# Altium PCB TramHanSTM8.PcbDoc
Units mm, origin at the board's own origin, x right, y up, seen from the top; angles counter-clockwise.
Board outline 64.47 x 27.51 mm, 2 copper layers (Top Layer, Bottom Layer); 38 components, 40 nets, 158 pads, 17 vias.
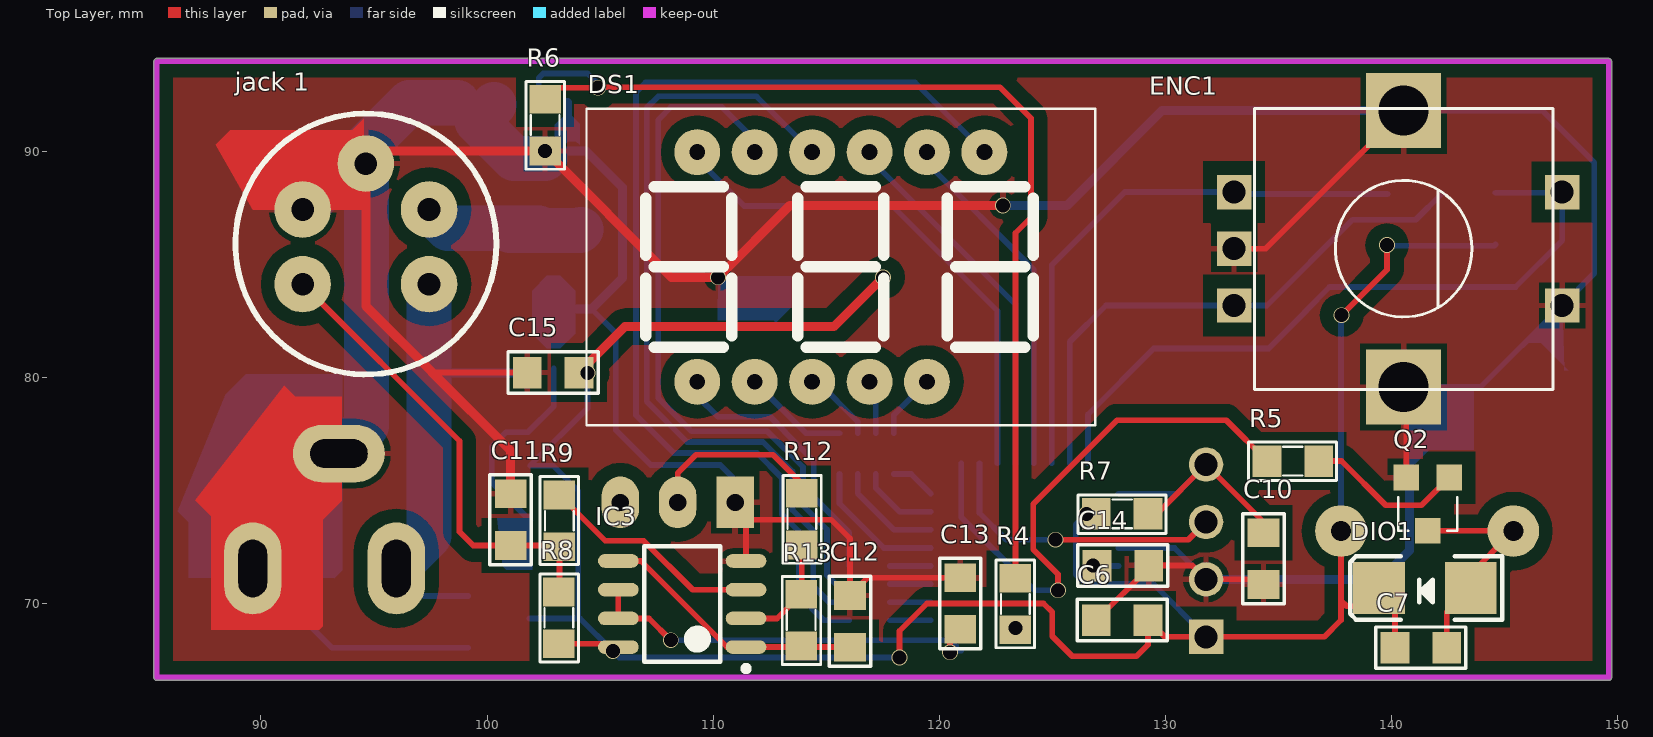
[diagram p0: Top Layer view]
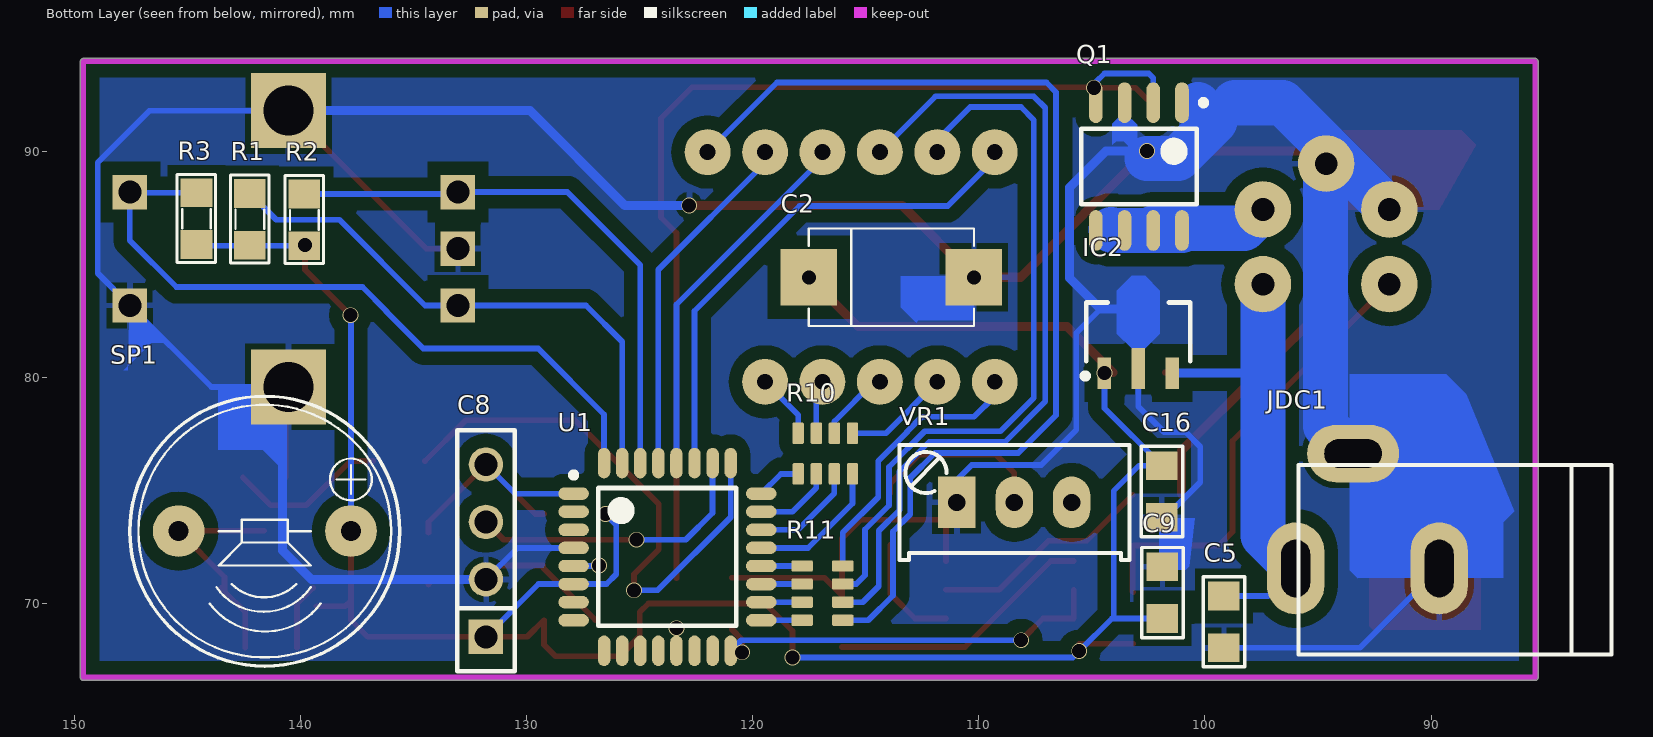
[diagram p1: Bottom Layer view, seen from below]
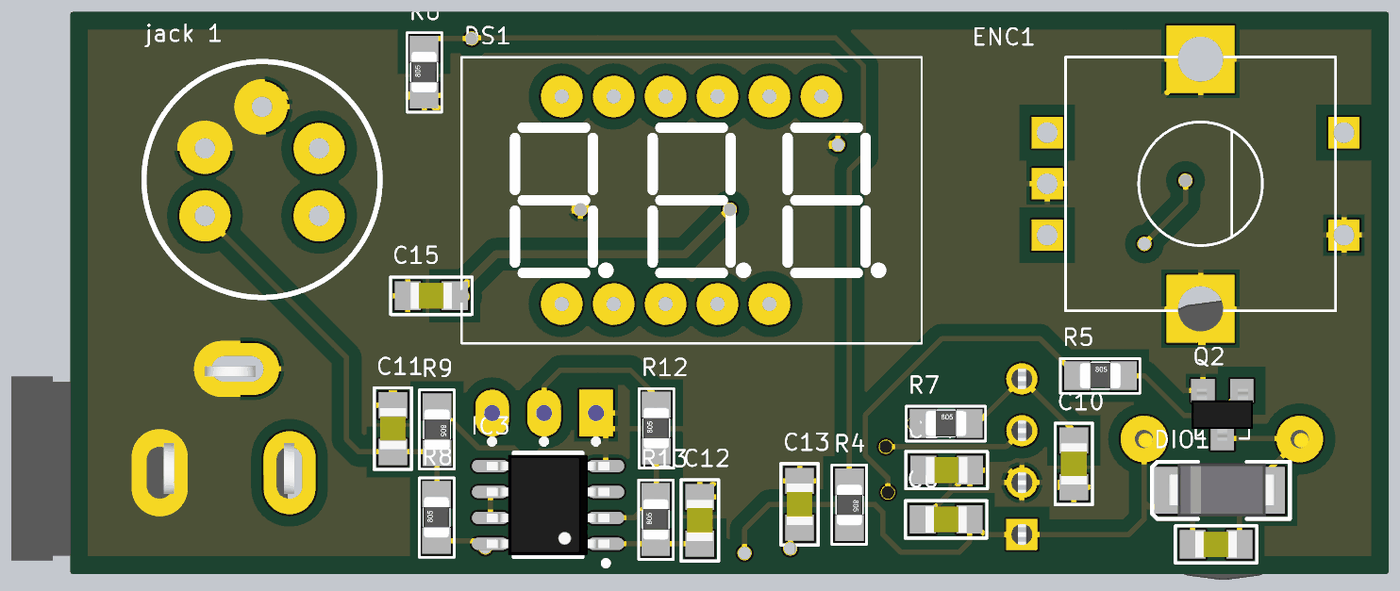
[diagram p2: 3D render of the assembled board from above, using the file's embedded part models]
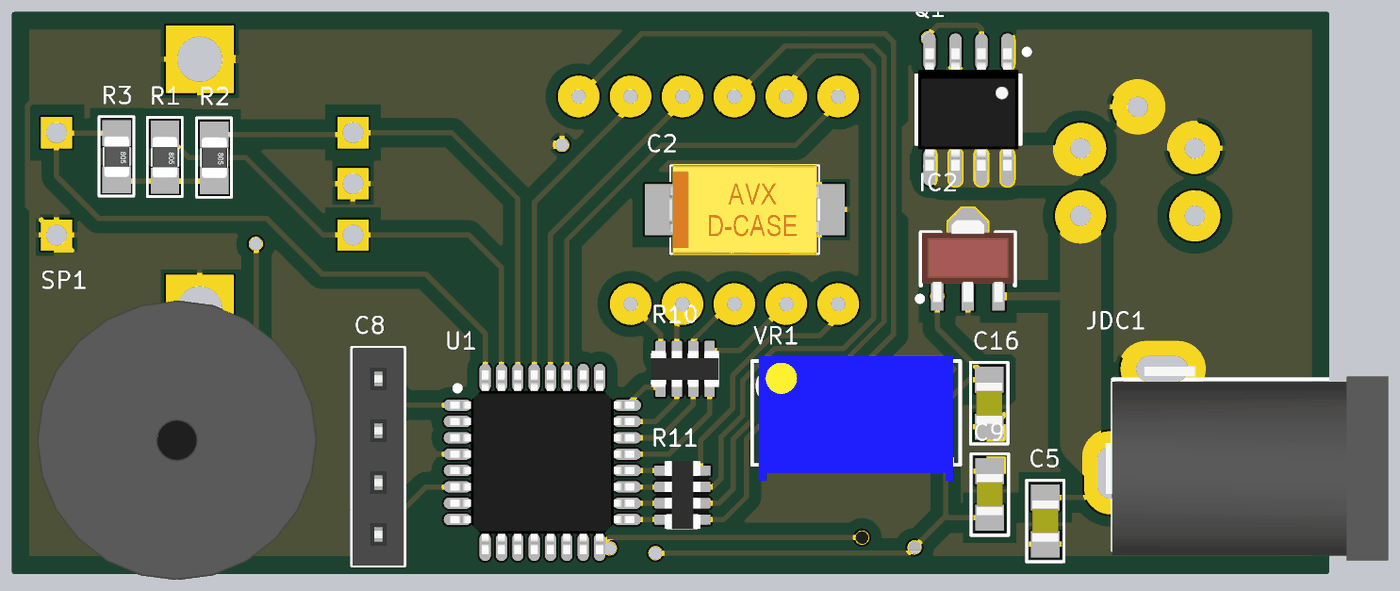
[diagram p3: 3D render of the assembled board from below, using the file's embedded part models]

## Layer stack, top to bottom
Top Solder: solder mask 0.0102, Solder Resist, Dk 3.5
Top Layer: signal copper 0.0356
Dielectric 1: dielectric 0.32, FR-4, Dk 4.8
Bottom Layer: signal copper 0.0356
Bottom Solder: solder mask 0.0102, Solder Resist, Dk 3.5

## Board outline
85.267,66.726 ccw(c85.395,66.726) 85.395,66.598 149.606,66.598 ccw(c149.606,66.726) 149.733,66.726 149.733,93.98 ccw(c149.606,93.98) 149.606,94.107 85.395,94.107 ccw(c85.395,93.98) 85.267,93.98

## Design rules (kind name [scope] priority, off if disabled: settings)
Clearance [All] p1: gap=0.22 ignorepadtopadclearanceinfootprint=FALSE
PolygonConnect [All] p1: connectstyle=Relief reliefconductorwidth=0.254 reliefentries=4 polygonreliefangle="90 Angle" airgapwidth=0.254
RoutingVias [All] p1: holewidth=0.62 width=0.7 viastyle="Through Hole" minholewidth=0.62 minwidth=0.7 maxholewidth=0.62 maxwidth=0.7
SolderMaskExpansion [All] p1: expansion=0.102
Width [All] p1: maxlimit=2 minlimit=0.254 preferedwidth=0.4
30 further rules are at their usual default settings.

## Components (designator, comment, footprint, x,y, rotation, side; value= is the part's Value field where it differs from the comment)
C2 "CAP" "C 2917" 113.868,84.43 r180 bottom value=*uF
C5 "103" SM-0805 99.162,69.19 r90 bottom
C6 "103" SM-0805 128.092,69.266 r0 top
C7 "103" SM-0805 141.3,68.047 r0 top
C8 "JP4" JP4-C1T 131.801,68.529 r90 bottom
C9 "103" SM-0805 101.879,70.485 r270 bottom
C10 "103" SM-0805 134.341,71.984 r90 top
C11 "103" SM-0805 101.041,73.711 r270 top
C12 "103" SM-0805 116.053,69.215 r90 top
C13 "103" SM-0805 120.929,70.002 r90 top
C14 "103" SM-0805 128.118,71.679 r0 top
C15 "103" SM-0805 102.921,80.213 r180 top
C16 "103" SM-0805 101.905,74.955 r270 bottom
DIO1 "Diode SMD" DIO-SMD-106 141.478,70.688 r0 top value=1N5007
DS1 "7SEG" "LED 7 SEG 3 DIGIT" 115.646,84.887 r0 top
ENC1 "enc" ENC 140.411,95.856 r270 top
IC2 "LM78xx" SOT89-321 102.946,81.991 r90 bottom
IC3 "LM358" SO8 108.63,69.977 r180 top
"jack 1" "907" "jack 907" 98.323,87.173 r180 top
JDC1 "Jac DC" DC0 92.812,74.092 r0 bottom
Q1 "IRF7303" SO8 102.921,89.326 r270 bottom
Q2 "C1815" "SOT 23" 141.605,74.397 r180 top
R1 "1k" SM-RES-0805 142.24,88.138 r270 bottom value="R1/4W - 1K"
R2 "1k" SM-RES-0805 139.827,88.113 r270 bottom value="R1/4W - 1K"
R3 "1k" SM-RES-0805 144.602,88.163 r270 bottom value="R1/4W - 1K"
R4 "1k" SM-RES-0805 123.368,71.12 r270 top value="R1/4W - 1K"
R5 "1k" SM-RES-0805 134.493,76.302 r0 top value="R1/4W - 1K"
R6 "10k" SM-RES-0805 102.565,90.018 r90 top value="R1/4W - 1K"
R7 "1k" SM-RES-0805 126.949,73.965 r0 top value="R1/4W - 1K"
R8 "1.5k" SM-RES-0805 103.175,68.224 r90 top value="R1/4W - 1K"
R9 "10k" SM-RES-0805 103.2,74.803 r270 top value="R1/4W - 1K"
R10 "RP330" RESCAXS50P160X320X70-8N 116.789,76.632 r90 bottom
R11 "RP330" RESCAXS50P160X320X70-8N 116.916,70.46 r180 bottom
R12 "1k" SM-RES-0805 113.919,72.593 r90 top value="R1/4W - 1K"
R13 "10k" SM-RES-0805 113.894,68.123 r90 top value="R1/4W - 1K"
SP1 "Speaker" SPEAKER 141.58,73.203 r0 bottom value="Speaker Chip"
U1 "STM8S003K3" TQFP32 123.774,72.06 r180 bottom
VR1 "10K" VR1 110.973,74.473 r180 bottom value="VR 10K"

## Footprints (in the part's own frame and the unit in brackets; to place one, negate y for a bottom-side part, rotate by r counter-clockwise, add the part's x,y. Pads: shape width x height; smd on the part's side, far side on the other; paste and mask are expansions set on the pad)
"C 2917" [mm] "Tantalium 100u/16V"
  rect 2.5x2.5 smd: 1(-3.65,0) 2(3.65,0)
  silkscreen extent -3.65,-2.16 3.65,2.16, body extent -3.7,-2.22 3.7,2.23, height 3.01
DC0 [mil] "Jac DC input"
  oval 100x160 hole 50 slot 100 at 90 deg: 1(125,100) 2(-125,100)
  oval 160x100 hole 50 slot 100 at 0 deg: 3(25,-100)
  silkscreen extent -425,-80 120,250, body extent -410,-105 134,269, height 434
DIO-SMD-106 [mil]
  rect 90x90.55 smd: 1(80,0) 2(-80,0)
  silkscreen extent -130,-55 135,55, body extent -99,-50 106,52, height 95
ENC [mil] "encoder"
  rect 60x60 hole 40: A(301.57,-290.28) B(499,-290.28) C(400,-290.28) D(301.57,281) E(499,281)
  rect 130.51x130.5 hole 87: GND1(159.84,5)
  rect 130.5x130.5 hole 87: GND2(641,5)
  silkscreen extent 156,-255 645,265
"jack 907" [mm]
  round 2.5 hole 1: 1(0.889,3.048) 2(0.889,-0.254) 3(6.477,-0.254) 4(6.477,3.048) 5(3.683,-2.286)
  silkscreen extent -2.09,-4.5 9.45,7.04
JP4-C1T [mm] "4 row, straight, gold plating"
  rect 1.52x1.52 hole 1.02: 1(0,0)
  round 1.52 hole 1.02: 2(2.54,0) 3(5.08,0) 4(7.62,0)
  silkscreen extent -1.52,-1.27 9.14,1.27, body extent -1.52,-1.25 9.14,1.25, height 8.51
"LED 7 SEG 3 DIGIT" [mil] "LD-3361BS"
  round 80 hole 27.56: 1(-250,-200) 2(-150,-200) 3(-50,-200) 4(50,-200) 5(150,-200) 6(250,200) 7(150,200) 8(50,200) 9(-50,200) 10(-150,200) 11(-250,200)
  round 30 on Top Overlay: 12(-165,-135) 12(100,-135) 12(360,-135)
  silkscreen extent -443,-276 443,276
RESCAXS50P160X320X70-8N [mm]
  round 0.254 on Mech15: 0(0,0)
  rrect25% 0.95x0.5 smd: 1(-0.9,1.2) 2(-0.9,0.4) 3(-0.9,-0.4) 4(-0.9,-1.2) 5(0.9,-1.2) 6(0.9,-0.4) 7(0.9,0.4) 8(0.9,1.2)
  Top Layer pour cut-out: -0.4,1.7 0.4,1.7 0.4,-1.7 -0.4,-1.7
  body extent -0.87,-1.68 0.88,1.67, height 0.7
SM-0805 [mil] "Compoment SMD 80x50mil"
  rect 50x55 smd: 1(-45,0) 2(45,0)
  silkscreen extent -78,-36 78,36, body extent -40,-25 40,25, height 24
SM-RES-0805 [mil]
  rect 50x55 smd: 1(0,0) 2(90,0)
  silkscreen extent -32,-34 121,33, body extent 6,-25 84,25, height 31
SO8 [mm] "SOIC, 8-Leads, Body 4.9x3.9mm, Pitch 1.27mm, IPC High Density"
  oval 1.8x0.6 smd: 1(-2.825,1.905) 2(-2.825,0.635) 3(-2.825,-0.635) 4(-2.825,-1.905) 5(2.825,-1.905) 6(2.825,-0.635) 7(2.825,0.635) 8(2.825,1.905)
  silkscreen extent -2.95,-2.55 1.68,2.98, body extent -2.99,-2.45 3,2.45, height 1.6
SOT89-321 [mm] "SOT89, 3-Leads, Body 4.55x2.55mm, Pitch 1.50mm, Lead Span 4.1mm, IPC Medium Density"
  rect 1.4x0.6 smd: 1(-1.8,-1.5) 3(-1.8,1.5)
  rect 1.8x0.6 smd: 2(-1.6,0)
  Top Layer region: -0.7,0.3 -0.05,0.95 1.85,0.95 2.5,0.3 2.5,-0.3 1.85,-0.95 -0.05,-0.95 -0.7,-0.3
  silkscreen extent -2.05,-2.3 1.32,2.48, body extent -2.08,-2.25 1.92,2.25, height 1.5
"SOT 23" [mil]
  rect 45x45 smd: 1(-37.4,-46.26) 2(37.4,-46.26) 3(0,46.26)
  silkscreen extent -51,-12 51,46, body extent -59,-50 59,50, height 43
SPEAKER [mil]
  round 90 hole 35: 1(-150,0) 2(150,0)
  silkscreen extent -235,-235 235,235, body extent -266,-267 272,272, height 299
TQFP32 [mm] "Thin QFP, 32-Leads, Body 9x9mm, Pitch 0.8mm, IPC Low Density"
  oval 1.35x0.55 smd: 1(-4.15,2.8) 2(-4.15,2) 3(-4.15,1.2) 4(-4.15,0.4) 5(-4.15,-0.4) 6(-4.15,-1.2) 7(-4.15,-2) 8(-4.15,-2.8) 17(4.15,-2.8) 18(4.15,-2) 19(4.15,-1.2) 20(4.15,-0.4) 21(4.15,0.4) 22(4.15,1.2) 23(4.15,2) 24(4.15,2.8)
  oval 0.55x1.35 smd: 9(-2.8,-4.15) 10(-2,-4.15) 11(-1.2,-4.15) 12(-0.4,-4.15) 13(0.4,-4.15) 14(1.2,-4.15) 15(2,-4.15) 16(2.8,-4.15) 25(2.8,4.15) 26(2,4.15) 27(1.2,4.15) 28(0.4,4.15) 29(-0.4,4.15) 30(-1.2,4.15) 31(-2,4.15) 32(-2.8,4.15)
  silkscreen extent -4.28,-3.05 3.05,3.75, body extent -4.5,-4.5 4.5,4.5, height 1.4
VR1 [mil] "Variable Resistor"
  rect 65x90 hole 30: 1(0,0)
  oval 65x90 hole 30: 2(100,0) 3(200,0)
  silkscreen extent -100,-100 301,100, body extent -87,-130 288,110, height 455

## Part data
C5 C6 C7 C9 C10 C11 C12 C13 C14 C15 C16: library part CM, "Cap SMD"
C8: "WR-PHD 2.54 mm Angled Socket Header", Manufacturer="Würth Elektronik eiSos GmbH", partNo=613004143121, ComponentLink1 Description=Manufacturer, ComponentLink1URL=http://www.we-online.com, ComponentLink2 Description=Datasheet, ComponentLink2URL=http://katalog.we-online.de/em/datasheet/6130xx143121.pdf, Created by="Karrer Zheng", Created Date="29 March 2013", NoPins=04
DIO1: "Default Diode", Code - JEDEC=DO-214-AB, Published=8-Jun-2000, Publisher="Altium Limited", Revision="July-2002: Re-released for DXP Platform."
DS1: library part "LED 7 SEG 3 DIGIT"
ENC1: library part ENC
IC2: "Positive Voltage Regulator", ComponentLink1Description="Manufacturer Link", ComponentLink1URL=http://www.st.com/, ComponentLink2Description=Datasheet, ComponentLink2URL=http://www.st.com/stonline/products/literature/ds/2146/l78m05c.pdf, DatasheetVersion=Apr-1994, LatestRevisionDate=17-Jul-2002, LatestRevisionNote="Re-released for DXP Platform.", Note="Tab is connected to pin 3 (GND).", PackageDescription="TO, Thru-Hole, Vertical, Heatsink Mounted; 3 In-Line Leads; Pitch 2.54 mm; Pin sequence 1, 3, 2", PackageReference=ISOWATT220AB, PackageVersion=Jul-1998, Published=24-Aug-2001, Publisher="Altium Limited"
IC3: "Low-Power Dual Operational Amplifier"
"jack 1": library part "jack 907"
JDC1: library part DCIN, "Jac DC input"
Q1: "HEXFET Power MOSFET", Code_IPC=SOIC127P600-8, Code_JEDEC=MS-012-AA, ComponentLink1Description="Manufacturer Link", ComponentLink1URL=http://www.irf.com/, ComponentLink2Description=Datasheet, ComponentLink2URL=http://www.irf.com/product-info/datasheets/data/irf7303.pdf, DatasheetVersion=Aug-1997, LatestRevisionDate=13-Apr-2006, LatestRevisionNote="IPC-7351 Footprint Added.", PackageDescription="8-Pin Plastic Small Outline Integrated Circuit 1.27 mm Pitch", PackageReference=SO-8, PackageVersion=Feb-2001, Published=8-Jun-2000, Publisher="Altium Limited"
Q2: library part C1815_SMD
R1 R2 R3 R4 R5 R6 R7 R8 R9 R12 R13: library part R1/4W, "Resistor 1/4W"
R10 R11: library part ResPack
SP1: library part SPK, "Speaker Chip"
U1: "MCU 8BIT  8KB FLASH LQFP-32"
VR1: library part VR1, "Var Resistor"

## Via types
v1: diameter 0.7, hole 0.62, Top Layer to Bottom Layer, 17 vias

## Nets (pads, with @x,y where several pads share a name; then routed paths per layer and width w, separated by ;. In a path a pad name is that pad's centre, name@x,y a point inside that pad or via, vN(x,y) a via of type N, cw(c..) or ccw(c..) an arc to the next point about the centre after c; other vN are vias at no path point)
24V: "jack 1.1" C5.2 IC2.1 JDC1.1 | length 21.1
  Bottom Layer w0.254: JDC1.1 97.206,70.333 C5.2
  Bottom Layer w0.4: 97.434,79.654 97.971,80.191 IC2.1
  Bottom Layer w2: JDC1.1 97.434,73 97.434,79.654 97.434,84.125
"907 sensor": "jack 1.4" C11.2 R8.2 R9.2 | length 20.5
  Top Layer w0.254: 91.846,84.125 98.781,77.191 98.781,73.177 99.39,72.568 C11.2 103.149,72.568 R9.2 103.2,70.536 R8.2
GND: "jack 1.3" "jack 1.5" C2.2 C5.1 C6.1 C8.2 C9.1 C10.1 C11.1 C12.2 C13.2 C14.2 C15.2 C16.2 ENC1.C ENC1.E ENC1.GND1 ENC1.GND2 IC2.2 IC3.4 JDC1.2 JDC1.3 Q1.1 Q1.3 Q2.2 R6.1 U1.4 VR1.1 | length 241.4
  Top Layer w0.254: 97.574,80.226 97.587,80.213 C15.2 ; VR1.1 VR1.1@111.455,73.99 ; IC3.4 VR1.1@111.455,73.99 ; C13.2 116.84,71.145 C12.2 116.053,72.873 115.214,73.711 111.735,73.711 VR1.1@111.455,73.99 ; C6.1 129.261,71.577 C14.2 131.191,71.679 C8.2 134.112,71.069 C10.1 ; ENC1.C 134.438,85.696 ENC1.GND1 ; ENC1.GND2 140.655,79.457 Q2.2
  Top Layer w0.4: 97.574,80.226 94.64,83.16 94.64,89.459 95.199,90.018 v1(102.565,90.018) 108.153,84.43 v1(110.218,84.43) 113.393,87.605 v1(122.809,87.605) ; 97.587,80.213 101.041,76.759 C11.1
  Bottom Layer w0.254: JDC1.2 93.142,68.047 C5.1 ; C9.1 101.905,71.653 C16.2 101.752,73.812 100.203,75.362 100.203,76.937 100.838,77.572 101.803,77.572 102.946,78.715 IC2.2 ; 104.623,83.033 105.689,81.966 105.689,77.673 107.239,76.124 110.312,76.124 110.973,75.463 VR1.1 VR1.1@111.252,74.193 ; U1.4 130.41,72.46 C8.2 ; ENC1.GND2 143.942,79.574 ENC1.E 148.971,84.603 148.971,89.51 146.685,91.796 ENC1.GND1
  Bottom Layer w0.4: v1@102.565,89.687 v1@102.895,90.018 ; v1(102.565,90.018) v1@102.895,90.018 ; 102.819,82.906 102.946,83.033 104.623,83.033 105.994,84.404 105.994,88.392 104.369,90.018 v1@102.895,90.018 ; Q1.3 103.556,90.678 v1@102.895,90.018 ; v1(122.809,87.605) 125.654,87.605 129.845,91.796 ENC1.GND1 ; C8.2 139.522,71.069 140.792,72.339 140.792,79.32 ENC1.GND2
  Bottom Layer w2: JDC1.2 89.637,72.822 JDC1.3 94.666,77.851 94.666,89.433 94.64,89.459 ; 91.846,87.427 96.571,92.151 98.679,92.151 ; 100.305,92.075 99.555,91.326 101.194,89.687 v1@102.565,89.687
LEFT: ENC1.A R2.1 U1.30 | length 25
  Bottom Layer w0.254: U1.30 124.974,84.969 128.201,88.196 ENC1.A 133.121,88.113 R2.1
NetC7_2: C7.2 DIO1.1 Q2.3 SP1.2 | length 10.4
  Top Layer w0.254: Q2.3 145.371,73.222 SP1.2 143.358,71.171 DIO1.1@143.358,70.536 ; C7.2 142.443,69.621 DIO1.1@143.358,70.536 ; DIO1.1 DIO1.1@143.358,70.536
NetC12_1: C12.1 IC3.1 IC3.5 R13.1 | length 11.8
  Top Layer w0.254: IC3.5 106.807,71.882 110.617,68.072 IC3.1 C12.1
NetC14_1: C14.1 U1.5 | length 1.1
  Bottom Layer w0.254: v1(126.797,71.679) 126.816,71.66 U1.5
NetDS1_1: DS1.1 R11.8 | length 12.3
  Bottom Layer w0.254: DS1.1 109.296,79.172 110.211,78.257 112.522,78.257 113.182,77.597 113.182,77.572 114.452,76.302 114.452,74.701 116.016,73.138 R11.8
NetDS1_2: DS1.2 R10.5 | length 4.7
  Bottom Layer w0.254: DS1.2 114.111,77.532 R10.5
NetDS1_3: DS1.3 R10.6 | length 3.3
  Bottom Layer w0.254: DS1.3 114.63,79.807 116.389,78.048 R10.6
NetDS1_4: DS1.4 R10.7 | length 2.4
  Bottom Layer w0.254: DS1.4 117.189,79.534 R10.7
NetDS1_5: DS1.5 R10.8 | length 2.9
  Bottom Layer w0.254: R10.8 117.989,78.34 DS1.5
NetDS1_6: DS1.6 R11.5 | length 46.9
  Bottom Layer w0.254: R11.5 114.89,69.26 113.792,70.358 113.792,73.183 113.03,73.945 113.03,75.565 111.938,76.657 108.255,76.657 106.587,78.325 106.587,92.617 107.01,93.04 118.923,93.04 DS1.6
NetDS1_7: DS1.7 U1.29 | length 15.7
  Bottom Layer w0.254: DS1.7 119.456,89.484 124.174,84.766 U1.29
NetDS1_8: DS1.8 U1.28 | length 16.4
  Bottom Layer w0.254: DS1.8 116.916,89.687 123.374,83.229 U1.28
NetDS1_9: DS1.9 R11.6 | length 36.6
  Bottom Layer w0.254: DS1.9 111.912,92.431 107.569,92.431 107.061,91.923 107.061,78.933 108.846,77.148 112.199,77.148 113.504,75.843 113.504,74.141 114.427,73.218 114.427,70.764 115.132,70.06 R11.6
NetDS1_10: DS1.10 R11.7 | length 32
  Bottom Layer w0.254: DS1.10 111.836,90.5 110.38,91.957 108.136,91.957 107.569,91.389 107.569,79.096 109.042,77.622 112.395,77.622 113.978,76.039 113.978,74.337 115.037,73.279 115.037,71.247 115.424,70.86 R11.7
NetDS1_11: DS1.11 U1.27 | length 23.1
  Bottom Layer w0.254: DS1.11 109.296,89.662 111.379,87.579 117.932,87.579 122.574,82.937 U1.27
NetIC3_2: IC3.2 R12.1 R13.2 | length 5.1
  Top Layer w0.254: IC3.2 112.827,69.342 R13.2 113.919,70.434 R12.1
NetIC3_3: IC3.3 R9.1 | length 10
  Top Layer w0.254: R9.1 105.232,72.771 106.934,72.771 109.093,70.612 IC3.3
"Netjack 1_2": "jack 1.2" Q1.5 Q1.6 Q1.7 Q1.8 | length 8.3
  Bottom Layer w2: 97.434,87.427 98.266,86.595 Q1.7@102.286,86.595 ; Q1.8 Q1.7 Q1.6 104.103,86.501 104.14,86.538
NetQ1_2: Q1.2 Q1.4 R4.1 R6.2 | length 46.6
  Top Layer w0.254: R6.2 103.073,92.812 v1(104.902,92.812) 104.927,92.837 122.682,92.837 124.054,91.465 124.054,87.071 123.368,86.385 R4.1
  Bottom Layer w0.254: Q1.2@102.286,92.309 102.286,93.243 102.489,93.447 104.445,93.447 v1@104.826,93.066
NetQ2_1: Q2.1 R5.2 | length 7.1
  Top Layer w0.254: R5.2 137.795,76.302 139.751,74.346 141.329,74.346 Q2.1
NetR10_1: R10.1 U1.24 | length 2
  Bottom Layer w0.254: R10.1 118.752,75.732 U1.24
NetR10_2: R10.2 U1.23 | length 3.5
  Bottom Layer w0.254: R10.2 117.189,75.114 118.244,74.06 U1.23
NetR10_3: R10.3 U1.22 | length 4.8
  Bottom Layer w0.254: R10.3 116.389,74.873 118.002,73.26 U1.22
NetR10_4: R10.4 U1.21 | length 6.2
  Bottom Layer w0.254: R10.4 115.589,74.428 117.558,72.46 U1.21
NetR11_1: R11.1 U1.20 | length 1.8
  Bottom Layer w0.254: R11.1 U1.20@119.624,71.66
NetR11_2: R11.2 U1.19 | length 1.8
  Bottom Layer w0.254: R11.2@117.816,70.86 U1.19
NetR11_3: R11.3 U1.18 | length 1.8
  Bottom Layer w0.254: R11.3 U1.18
NetR11_4: R11.4 U1.17 | length 1.8
  Bottom Layer w0.254: R11.4 U1.17
NetR12_2: R12.2 VR1.2 | length 8.1
  Top Layer w0.254: VR1.2 108.433,75.768 109.245,76.581 112.649,76.581 113.919,75.311 R12.2
OK: ENC1.D R3.1 U1.32 | length 31.4
  Bottom Layer w0.254: U1.32 126.574,78.365 129.489,81.28 134.569,81.28 136.195,82.906 136.195,82.931 137.262,83.998 145.491,83.998 147.549,86.055 ENC1.D 147.516,88.163 R3.1
PWM: R4.2 U1.13 | length 0.1
  Top Layer w0.254: R4.2 v1(123.368,68.91)
RIGHT: ENC1.B R1.1 U1.31 | length 24.6
  Bottom Layer w0.254: U1.31 125.774,81.578 127.377,83.181 ENC1.B 134.489,83.181 138.278,86.97 141.072,86.97 R1.1
RST: C8.4 C10.2 R7.2 U1.1 | length 12
  Top Layer w0.254: R7.2 129.616,73.965 C8.4 134.341,73.609 C10.2
  Bottom Layer w0.254: U1.1 130.511,74.86 C8.4
SENSOR: C13.1 IC3.6 IC3.7 U1.16 | length 18.5
  Top Layer w0.254: IC3.6 IC3.7 107.163,69.342 v1(108.128,68.377) ; v1(120.472,67.843) 120.472,68.402 C13.1
  Bottom Layer w0.254: v1(108.128,68.377) 120.507,68.377 U1.16@120.756,68.128 ; v1(120.472,67.843) 120.539,67.91 U1.16
SPK: R5.1 U1.25 | length 24.9
  Top Layer w0.254: v1(125.247,70.587) 125.247,71.298 124.155,72.39 124.155,74.397 127.864,78.105 132.69,78.105 R5.1
  Bottom Layer w0.254: U1.25 120.974,73.818 124.206,70.587 v1(125.247,70.587)
SWIM: C8.3 U1.26 | length 13
  Top Layer w0.254: v1(125.146,72.822) 131.013,72.822 C8.3
  Bottom Layer w0.254: U1.26 121.774,74.009 122.961,72.822 v1(125.146,72.822)
VCC: C2.1 C6.2 C7.1 C8.1 C9.2 C15.1 C16.1 DIO1.2 IC2.3 IC3.8 R1.2 R2.2 R3.2 R7.1 R8.1 SP1.1 U1.6 | length 109.4
  Top Layer w0.254: R8.1 IC3.8@105.562,68.224 ; v1(118.237,67.615) 118.237,68.783 119.456,70.002 124.612,70.002 124.993,69.621 124.993,68.555 125.882,67.666 128.727,67.666 129.235,68.174 C6.2 129.972,68.529 C8.1 137.033,68.529 137.77,69.266 137.77,70.129 ; SP1.1 137.77,70.129 ; v1(137.795,82.753) 139.802,84.76 v1(139.802,85.852) ; DIO1.2@139.294,69.875 138.024,69.875 137.77,70.129 ; DIO1.2 140.157,69.977 C7.1
  Top Layer w0.4: C15.1 106.096,82.245 115.334,82.245 v1(117.518,84.43)
  Bottom Layer w0.254: C9.2 104.115,69.342 ; v1(104.446,80.191) 104.446,78.64 C16.1 102.921,76.098 104.038,74.981 104.038,69.418 104.115,69.342 ; v1(118.237,67.615) 105.842,67.615 v1(105.562,67.894) 104.115,69.342 ; v1(126.517,73.965) 126.035,73.482 126.035,71.298 126.473,70.86 U1.6 129.47,70.86 C8.1 ; SP1.1 137.77,82.728 v1(137.795,82.753) ; R2.2 144.551,85.827 R3.2
pads on no net: DS1.12 R10.0 R11.0 U1.2 U1.3 U1.7 U1.8 U1.9 U1.10 U1.11 U1.12 U1.14 U1.15 VR1.3

## Polygon pours and split planes (outlines as drawn)
GND on Bottom Layer "Top Layer-No Net" (solid, remove dead copper, pour order 0): 85.395,93.98 85.395,66.726 149.606,66.726 149.606,93.98
GND on Top Layer "Top Layer-No Net" (solid, remove dead copper, pour order 2): 149.606,93.98 149.606,66.726 85.395,66.726 85.395,93.98

## Keep-outs
Keep-Out Layer:
  lines w0.254: 85.395,66.726 85.395,93.98 149.606,93.98 149.606,66.726 85.395,66.726

## Other copper
Top Layer:
  region net GND: 87.097,74.574 87.808,73.863 87.808,68.834 92.583,68.834 92.735,68.986 92.735,73.711 93.574,74.549 93.574,79.146 91.516,79.146 91.034,79.629
  region net GND: 89.611,87.452 89.637,87.427 94.539,87.427 94.539,91.44 94.031,90.932 88.646,90.932 88.011,90.297
Bottom Layer:
  region net GND: 103.48,91.643 103.001,91.164 103.001,90.453 103.933,90.453 104.105,90.281 104.105,91.221 103.632,91.694
  region net GND: 100.457,73.762 101.956,73.762 102.032,73.685 102.006,73.66 102.006,71.501 100.838,71.501 100.686,71.653
  region net GND: 147.549,83.181 146.05,81.682 146.05,81.534 146.609,81.534 147.828,80.315 147.65,80.315
  region net GND: 140.665,79.447 143.252,79.447 143.434,79.629 143.637,79.426 143.637,76.81 141.681,76.81 140.767,75.895
  region net GND: 110.218,84.43 110.269,84.48 113.462,84.48 113.462,83.109 112.776,82.423 112.674,82.525 110.211,82.525
  region net GND: 86.309,74.092 86.817,73.584 86.817,71.145 93.218,71.145 93.243,71.12 93.599,71.476 93.599,80.137 89.332,80.137 88.443,79.248

## Text inside footprints (layer, text, board x,y; h text height)
ENC1: Mechanical 3 ">NAME" at 149.047,88.196 h1.97 r270; Mechanical 5 ">VALUE" at 131.538,82.19 h1.97 r90